# Altium PCB PCB1.PcbDoc (part 1 of 2)
Units mil, origin at the board's own origin, x right, y up, seen from the top; angles counter-clockwise.
Board outline 3935 x 3935 mil, 2 copper layers (Top Layer, Bottom Layer); 151 components, 133 nets, 573 pads, 224 vias.
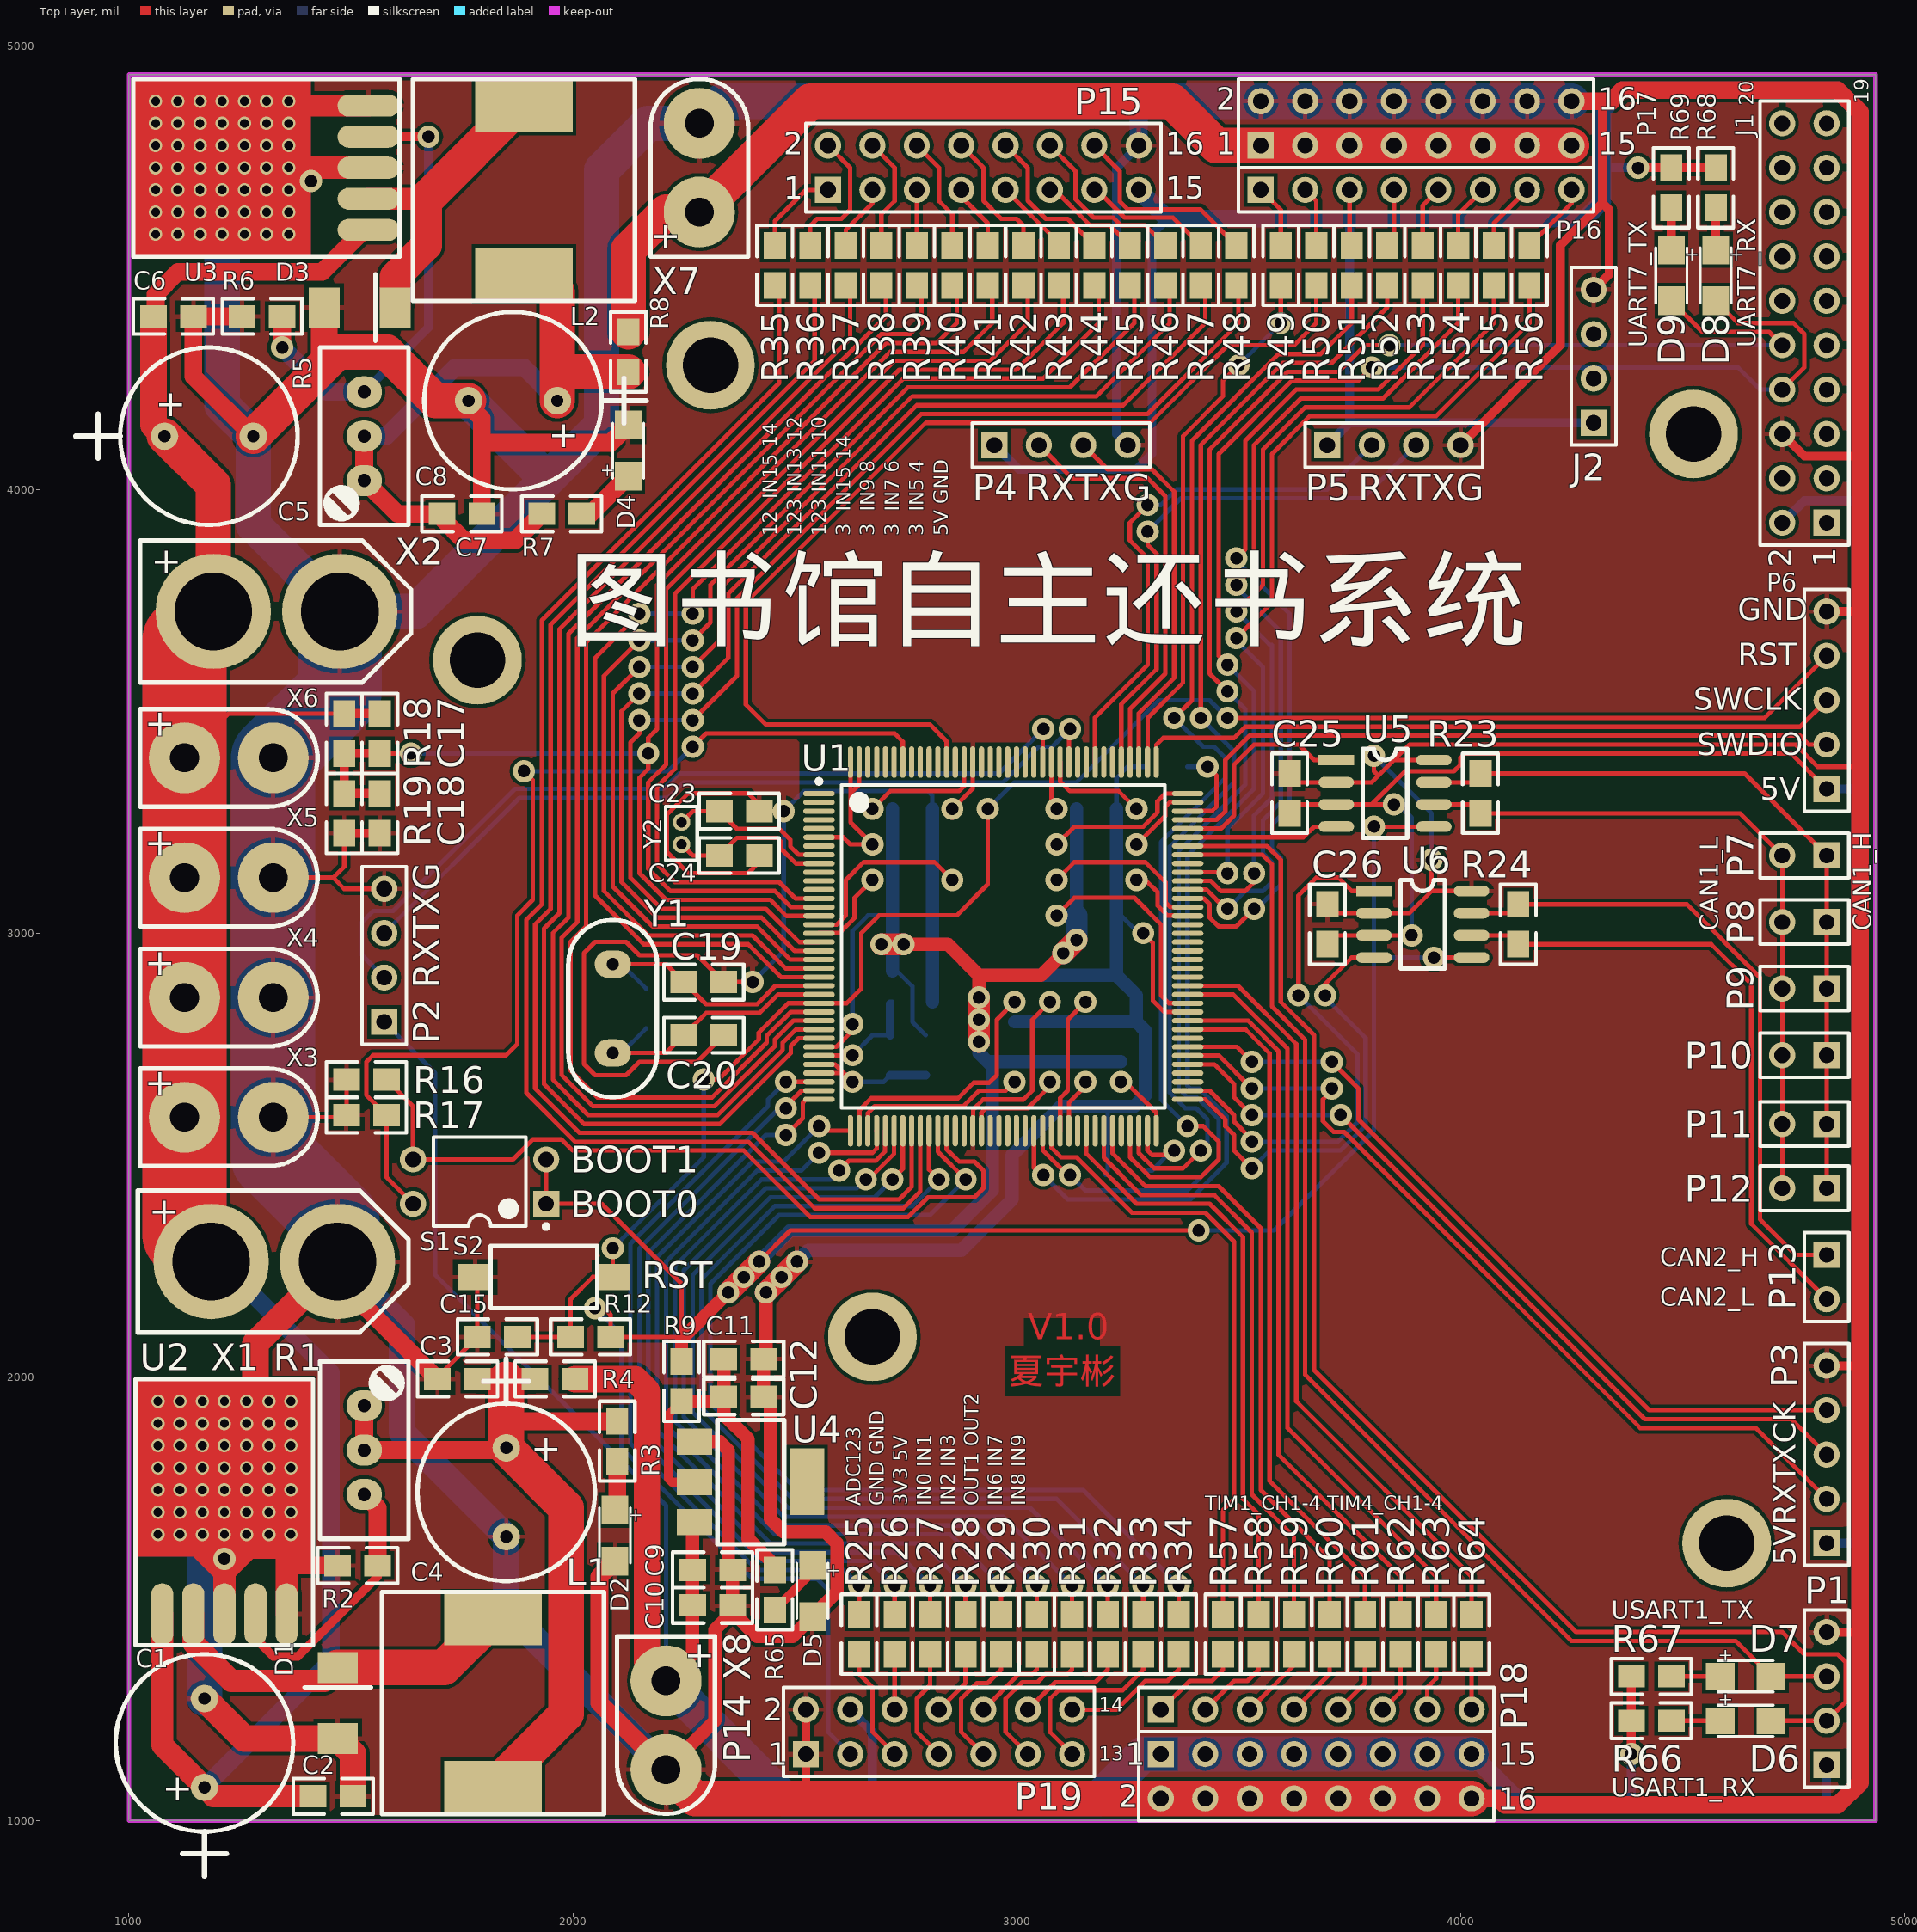
[diagram p0: Top Layer view]
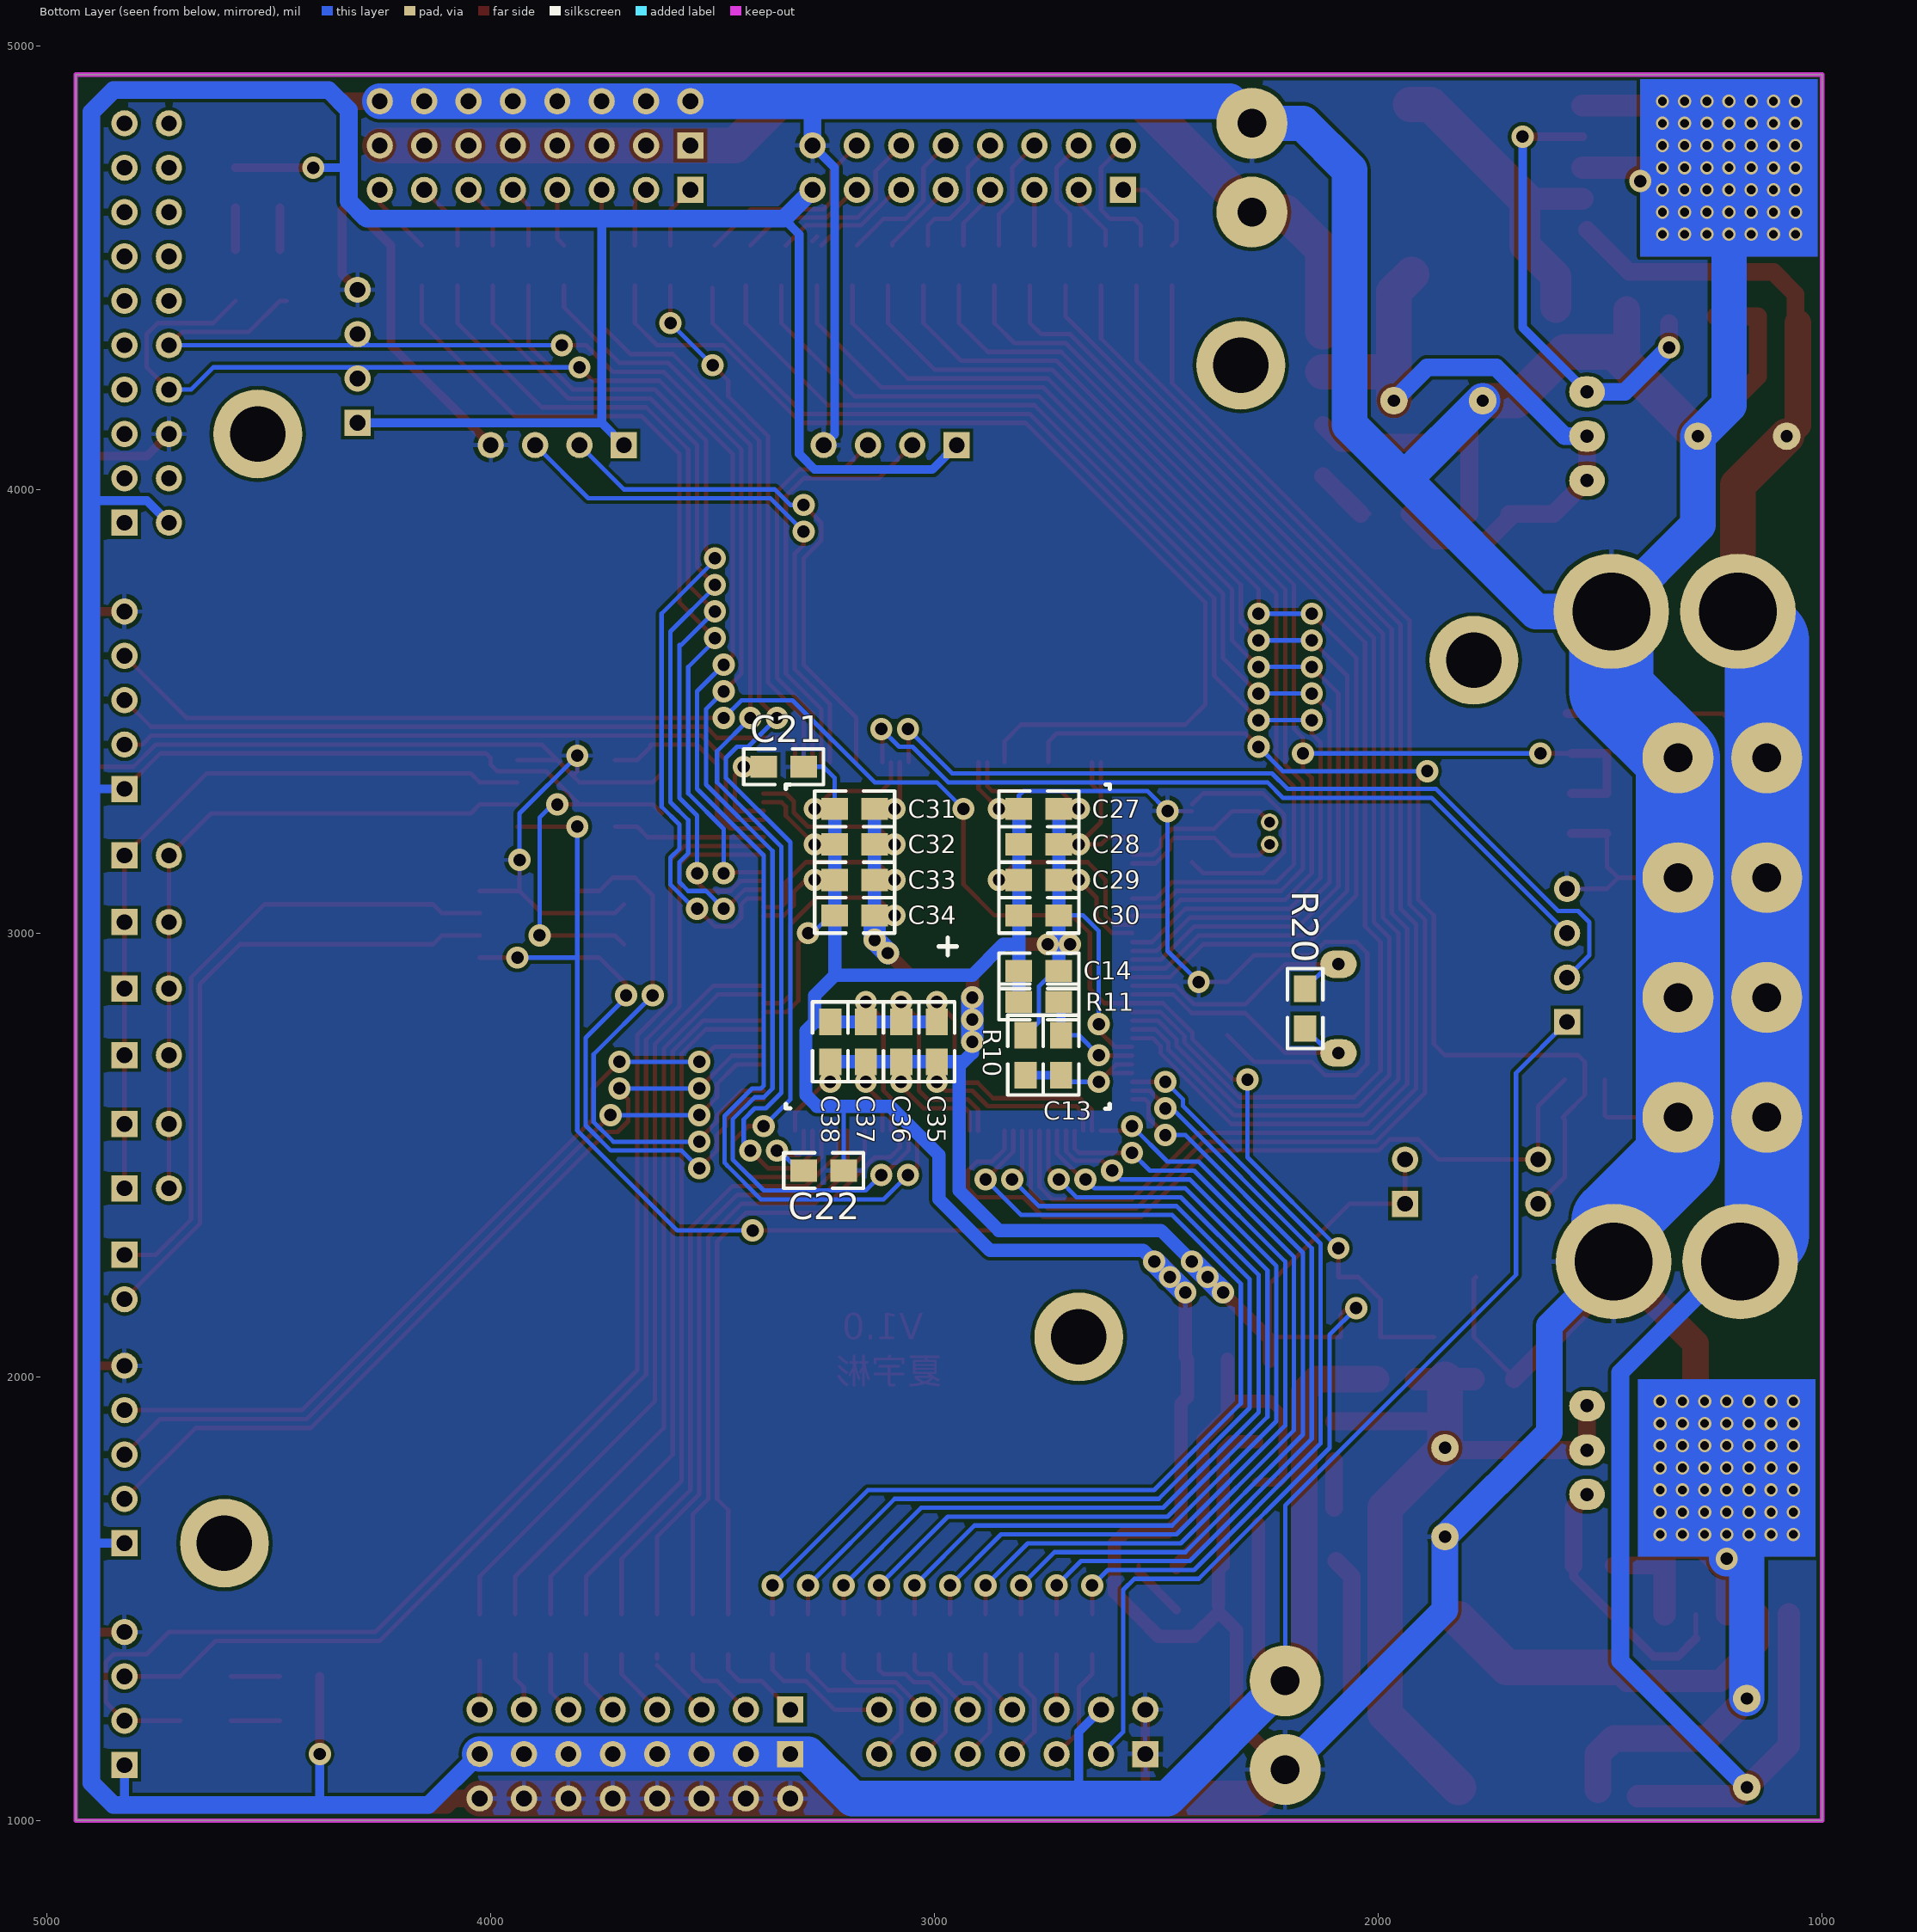
[diagram p1: Bottom Layer view, seen from below]

## Layer stack, top to bottom
Top Solder: solder mask 0.4, Solder Resist, Dk 3.5
Top Layer: signal copper 1.4
Dielectric 1: dielectric 12.6, FR-4, Dk 4.8
Bottom Layer: signal copper 1.4
Bottom Solder: solder mask 0.4, Solder Resist, Dk 3.5

## Board outline
1000,1000 4935,1000 4935,4935 1000,4935

## Design rules (kind name [scope] priority, off if disabled: settings)
Clearance [All] p1: gap=8
PolygonConnect [All] p1: connectstyle=Relief reliefconductorwidth=10 reliefentries=4 polygonreliefangle="90 Angle" airgapwidth=10
RoutingVias [All] p1: holewidth=28 width=50 viastyle="Through Hole" minholewidth=28 minwidth=50 maxholewidth=28 maxwidth=50
SolderMaskExpansion [All] p1: expansion=4
Width [All] p1: maxlimit=10 minlimit=10 preferedwidth=10
30 further rules are at their usual default settings.

## Components (designator, comment, footprint, x,y, rotation, side; value= is the part's Value field where it differs from the comment)
C1 "Cap Pol1" RB-.2/.4 1170,1075 r270 top
C2 "Cap" 0805 1505,1055 r180 top
C3 "Cap" 0805 1785,1995 r180 top
C4 "Cap Pol1" RB-.2/.4 1850,1840 r90 top
C5 "Cap Pol1" RB-.2/.4 1080,4120 r180 top
C6 "Cap" 0805 1145,4390 r180 top
C7 "Cap" 0805 1705,3945 r0 top
C8 "Cap Pol1" RB-.2/.4 1965,4200 r0 top
C9 "Cap Pol1" 0805 2270,1565 r0 top
C10 "Cap" 0805 2360,1485 r180 top
C11 "Cap Pol1" 0805 2340,2040 r0 top
C12 "Cap" 0805 2430,1955 r180 top
C13 "Cap" 0805 2715,2770 r270 bottom
C14 "Cap" 0805 2810,2915 r180 bottom
C15 "Cap" 0805 1875,2090 r180 top
C17 "Cap" 0805 1565,3405 r90 top
C18 "Cap" 0805 1565,3225 r90 top
C19 "Cap" 0805 2250,2890 r0 top
C20 "Cap" 0805 2250,2770 r0 top
C21 "Cap" 0805 3295,3375 r0 bottom
C22 "Cap" 0805 3205,2465 r0 bottom
C23 "12pF" 0805 2420,3275 r180 top
C24 "12pF" 0805 2420,3175 r180 top
C25 "Cap" 0805 3615,3270 r90 top
C26 "Cap" 0805 3700,2975 r90 top
C27 "Cap" 0805 2810,3280 r180 bottom
C28 "Cap" 0805 2810,3200 r180 bottom
C29 "Cap" 0805 2810,3120 r180 bottom
C30 "Cap" 0805 2810,3040 r180 bottom
C31 "Cap" 0805 3225,3280 r180 bottom
C32 "Cap" 0805 3225,3200 r180 bottom
C33 "Cap" 0805 3225,3120 r180 bottom
C34 "Cap" 0805 3225,3040 r180 bottom
C35 "Cap" 0805 2995,2800 r270 bottom
C36 "Cap" 0805 3075,2800 r270 bottom
C37 "Cap" 0805 3155,2800 r270 bottom
C38 "Cap" 0805 3235,2800 r270 bottom
D1 "SS54" DO-214AA 1515,1150 r90 top
D2 "LED_RED" 1206_LED 2060,1705 r270 top
D3 "SS54" DO-214AA 1405,4365 r0 top
D4 "LED_RED" 1206_LED 2160,4025 r90 top
D5 "LED_RED" 1206_LED 2505,1580 r270 top
D6 "LED_RED" 1206_LED 4580,1190 r0 top
D7 "LED_RED" 1206_LED 4580,1290 r0 top
D8 "LED_RED" 1206_LED 4540,4545 r270 top
D9 "LED_RED" 1206_LED 4440,4545 r270 top
J1 "Header 10X2H" HDR2X10 4825,3925 r90 top
J2 "USART3" HDR1X4 4300,4150 r90 top
L1 "Inductor" 12*12*7贴片电感 1570,1015 r0 top
L2 "Inductor" 12*12*7贴片电感 1640,4425 r0 top
P1 "USART1" HDR1X4 4825,1125 r90 top
P2 "USART2" HDR1X4 1575,2800 r90 top
P3 "Header 5" HDR1X5 4825,1625 r90 top
P4 "USART3" HDR1X4 2950,4100 r0 top
P5 "USART3" HDR1X4 3700,4100 r0 top
P6 "Header 5" HDR1X5 4825,3325 r90 top
P7 "CAN1" HDR1X2 4825,3175 r180 top
P8 "CAN1" HDR1X2 4825,3025 r180 top
P9 "CAN1" HDR1X2 4825,2875 r180 top
P10 "CAN1" HDR1X2 4825,2725 r180 top
P11 "CAN1" HDR1X2 4825,2570 r180 top
P12 "CAN1" HDR1X2 4825,2425 r180 top
P13 "CAN2" HDR1X2 4825,2275 r270 top
P14 "Header 7X2" HDR2X7 2525,1150 r0 top
P15 "Header 8X2" HDR2X8#1 2575,4675 r0 top
P16 "Header 8" HDR1X8 3550,4675 r0 top
P17 "Header 8X2" HDR2X8#1 3550,4775 r0 top
P18 "Header 8" HDR1X8 3325,1250 r0 top
P19 "Header 8X2" HDR2X8#2 3325,1150 r0 top
R1 "Res Tap" 3296 1530,1835 r90 top
R2 "Res2" 0805 1470,1575 r0 top
R3 "Res2" 0805 2100,1900 r270 top
R4 "Res2" 0805 1915,1995 r0 top
R5 "Res Tap" 3296 1530,4120 r270 top
R6 "Res2" 0805 1255,4390 r0 top
R7 "Res2" 0805 1930,3945 r0 top
R8 "Res2" 0805 2125,4265 r90 top
R9 "Res2" 0805 2245,1945 r90 top
R10 "Res2" 0805 2795,2680 r90 bottom
R11 "Res2" 0805 2720,2845 r0 bottom
R12 "Res2" 0805 1995,2090 r0 top
R16 "Res2" 0805 1490,2670 r0 top
R17 "Res2" 0805 1490,2590 r0 top
R18 "9K" 0805 1485,3405 r90 top
R19 "1K" 0805 1485,3225 r90 top
R20 "Res2" 0805 2165,2785 r90 bottom
R23 "Res2" 0805 4045,3270 r90 top
R24 "120R" 0805 4130,2975 r90 top
R25 "100R" 0805 2645,1465 r270 top
R26 "100R" 0805 2725,1375 r90 top
R27 "100R" 0805 2805,1465 r270 top
R28 "100R" 0805 2885,1375 r90 top
R29 "100R" 0805 2965,1465 r270 top
R30 "100R" 0805 3045,1375 r90 top
R31 "100R" 0805 3125,1465 r270 top
R32 "100R" 0805 3205,1375 r90 top
R33 "100R" 0805 3285,1465 r270 top
R34 "100R" 0805 3365,1375 r90 top
R35 "100R" 0805 2455,4460 r90 top
R36 "100R" 0805 2535,4550 r270 top
R37 "100R" 0805 2615,4460 r90 top
R38 "100R" 0805 2695,4550 r270 top
R39 "100R" 0805 2775,4460 r90 top
R40 "100R" 0805 2855,4550 r270 top
R41 "100R" 0805 2935,4460 r90 top
R42 "100R" 0805 3015,4550 r270 top
R43 "100R" 0805 3095,4460 r90 top
R44 "100R" 0805 3175,4550 r270 top
R45 "100R" 0805 3255,4460 r90 top
R46 "100R" 0805 3335,4550 r270 top
R47 "100R" 0805 3415,4460 r90 top
R48 "100R" 0805 3495,4550 r270 top
R49 "100R" 0805 3595,4460 r90 top
R50 "100R" 0805 3675,4460 r90 top
R51 "100R" 0805 3755,4460 r90 top
R52 "100R" 0805 3835,4460 r90 top
R53 "100R" 0805 3915,4460 r90 top
R54 "100R" 0805 3995,4460 r90 top
R55 "100R" 0805 4075,4460 r90 top
R56 "100R" 0805 4155,4460 r90 top
R57 "100R" 0805 3465,1465 r270 top
R58 "100R" 0805 3545,1465 r270 top
R59 "100R" 0805 3625,1465 r270 top
R60 "100R" 0805 3705,1465 r270 top
R61 "100R" 0805 3785,1465 r270 top
R62 "100R" 0805 3865,1465 r270 top
R63 "100R" 0805 3945,1465 r270 top
R64 "100R" 0805 4025,1465 r270 top
R65 "Res2" 0805 2455,1475 r90 top
R66 "Res2" 0805 4475,1225 r180 top
R67 "Res2" 0805 4475,1325 r180 top
R68 "Res2" 0805 4575,4635 r90 top
R69 "Res2" 0805 4475,4635 r90 top
S1 "SW DIP-2" DIP-4 1790,2440 r180 top
S2 "SW-PB" "3*6 开关" 1815,2155 r0 top
U1 "STM32F429ZGT6" STM-LQFP144_N 2970,2970 r0 top locked
U2 "LM2596S-ADJ" TO-263 1015,1395 r0 top
U3 "LM2596S-ADJ" TO-263 1610,4525 r90 top
U4 "AMS1117-3.3V" SOT223 2274,1853.55 r270 top
U5 "MCP2562-E/MF" SO-8 3720,3390 r0 top
U6 "MCP2562-E/MF" SO-8 3805,3095 r0 top
X1 "XT60" XT60PB 1020,2100 r0 top
X2 "XT60" XT60PB 1025,3565 r0 top
X3 "XT30" XT30UPB 1025,2475 r0 top
X4 "XT30" XT30UPB 1025,2745 r0 top
X5 "XT30" XT30UPB 1025,3015 r0 top
X6 "XT30" XT30UPB 1025,3285 r0 top
X7 "XT30" XT30UPB 2395,4525 r90 top
X8 "XT30" XT30UPB 2100,1415 r270 top
Y1 "8MHz" XTAL 2090,2830 r270 top
Y2 "32.768k" MHDR1X2 2245,3200 r90 top

## Footprints (in the part's own frame and the unit in brackets; to place one, negate y for a bottom-side part, rotate by r counter-clockwise, add the part's x,y. Pads: shape width x height; smd on the part's side, far side on the other; paste and mask are expansions set on the pad)
"3*6 开关" [mil]
  rect 80x60 smd: 1(-35,70) 2(275,70)
  silkscreen extent 0,0 240,140
12*12*7贴片电感 [mil]
  rect 220x120 smd: 1(250,440) 2(250,60)
  silkscreen extent 0,0 500,500
0805 [mil]
  rect 60x50 smd: 1(0,0) 2(90,0)
  silkscreen extent -45,-40 135,40
1206_LED [mil]
  rect 65x60 smd: 1(5,35) 2(120,35)
  silkscreen extent 0,0 125,70
3296 [mil]
  oval 70x80 hole 30: 1(-100,0) 2(0,0) 3(100,0)
  silkscreen extent -200,-100 200,100
DIP-4 [mm] "DIP; 4 Leads; Row Spacing 7.62 mm; Pitch 2.54 mm"
  rect 1.5x1.5 hole 0.9: 1(-3.81,1.27)
  round 1.5 hole 0.9: 2(-3.81,-1.27) 3(3.81,-1.27) 4(3.81,1.27)
  silkscreen extent -3.94,-2.55 2.65,2.69, body extent -3.15,-2.5 3.15,2.5, height 5.6
DO-214AA [mil]
  rect 70x90 smd: 1(35,45) 2(195,45)
  silkscreen extent 150,-30 150,120
HDR1X2 [mm] "Connector; Header; 2 Position"
  rect 1.5x1.5 hole 0.9: 1(0,0)
  round 1.5 hole 0.9: 2(2.54,0)
  silkscreen extent -1.27,-1.27 3.81,1.27
HDR1X4 [mm] "Connector; Header; 4 Position"
  rect 1.5x1.5 hole 0.9: 1(0,0)
  round 1.5 hole 0.9: 2(2.54,0) 3(5.08,0) 4(7.62,0)
  silkscreen extent -1.27,-1.27 8.89,1.27
HDR1X5 [mm] "Connector; Header; 5 Position"
  rect 1.5x1.5 hole 0.9: 1(0,0)
  round 1.5 hole 0.9: 2(2.54,0) 3(5.08,0) 4(7.62,0) 5(10.16,0)
  silkscreen extent -1.27,-1.27 11.43,1.27
HDR1X8 [mm] "Connector; Header; 8 Position"
  rect 1.5x1.5 hole 0.9: 1(0,0)
  round 1.5 hole 0.9: 2(2.54,0) 3(5.08,0) 4(7.62,0) 5(10.16,0) 6(12.7,0) 7(15.24,0) 8(17.78,0)
  silkscreen extent -1.27,-1.27 19.05,1.27
HDR2X7 [mm] "Connector; Header; 7x2 Position"
  rect 1.5x1.5 hole 0.9: 1(0,0)
  round 1.5 hole 0.9: 2(0,2.54) 3(2.54,0) 4(2.54,2.54) 5(5.08,0) 6(5.08,2.54) 7(7.62,0) 8(7.62,2.54) 9(10.16,0) 10(10.16,2.54) 11(12.7,0) 12(12.7,2.54) 13(15.24,0) 14(15.24,2.54)
  silkscreen extent -1.27,-1.27 16.51,3.81
HDR2X8#1 [mm] "Connector; Header; 8x2 Position"
  rect 1.5x1.5 hole 0.9: 1(0,0)
  round 1.5 hole 0.9: 2(0,2.54) 3(2.54,0) 4(2.54,2.54) 5(5.08,0) 6(5.08,2.54) 7(7.62,0) 8(7.62,2.54) 9(10.16,0) 10(10.16,2.54) 11(12.7,0) 12(12.7,2.54) 13(15.24,0) 14(15.24,2.54) 15(17.78,0) 16(17.78,2.54)
  silkscreen extent -1.27,-1.27 19.05,3.81
HDR2X8#2 [mm] "Connector; Header; 8x2 Position"
  rect 1.5x1.5 hole 0.9: 1(0,0)
  round 1.5 hole 0.9: 2(0,-2.54) 3(2.54,0) 4(2.54,-2.54) 5(5.08,0) 6(5.08,-2.54) 7(7.62,0) 8(7.62,-2.54) 9(10.16,0) 10(10.16,-2.54) 11(12.7,0) 12(12.7,-2.54) 13(15.24,0) 14(15.24,-2.54) 15(17.78,0) 16(17.78,-2.54)
  silkscreen extent -1.27,-3.81 19.05,1.27
HDR2X10 [mm] "Connector; Header; 10x2 Position"
  rect 1.5x1.5 hole 0.9: 1(0,0)
  round 1.5 hole 0.9: 2(0,2.54) 3(2.54,0) 4(2.54,2.54) 5(5.08,0) 6(5.08,2.54) 7(7.62,0) 8(7.62,2.54) 9(10.16,0) 10(10.16,2.54) 11(12.7,0) 12(12.7,2.54) 13(15.24,0) 14(15.24,2.54) 15(17.78,0) 16(17.78,2.54) 17(20.32,0) 18(20.32,2.54) 19(22.86,0) 20(22.86,2.54)
  silkscreen extent -1.27,-1.27 24.13,3.81
MHDR1X2 [mm] "Connector; Header; 2 Position"
  round 1 hole 0.6: 1(0,0) 2(1.27,0)
  silkscreen extent -0.9,-0.9 2.17,0.9
RB-.2/.4 [mil]
  round 62 hole 28: 1(0,0) 2(-200,0)
  silkscreen extent -300,-200 200,200
SO-8 [mil]
  rect 80x24 smd: 1(0,0)
  oval 80x24 smd: 2(0,-50) 3(0,-100) 4(0,-150) 5(220,-150) 6(220,-100) 7(220,-50) 8(220,0)
  silkscreen extent 60,-175 160,25
SOT223 [mil]
  rect 59x79 smd: 1(0,0) 2(90.55,0) 3(181.1,0)
  rect 150x79 smd: 4(89.88,253.54)
  silkscreen extent -49,52 231,202
STM-LQFP144_N [mm] "Thin QFP, 144-Leads, Body 20x20mm, Pitch 0.5mm, IPC Medium Density"
  oval 1.8x0.3 smd: 1(-10.55,8.75) 2(-10.55,8.25) 3(-10.55,7.75) 4(-10.55,7.25) 5(-10.55,6.75) 6(-10.55,6.25) 7(-10.55,5.75) 8(-10.55,5.25) 9(-10.55,4.75) 10(-10.55,4.25) 11(-10.55,3.75) 12(-10.55,3.25) 13(-10.55,2.75) 14(-10.55,2.25) 15(-10.55,1.75) 16(-10.55,1.25) 17(-10.55,0.75) 18(-10.55,0.25) 19(-10.55,-0.25) 20(-10.55,-0.75) 21(-10.55,-1.25) 22(-10.55,-1.75) 23(-10.55,-2.25) 24(-10.55,-2.75) 25(-10.55,-3.25) 26(-10.55,-3.75) 27(-10.55,-4.25) 28(-10.55,-4.75) 29(-10.55,-5.25) 30(-10.55,-5.75) 31(-10.55,-6.25) 32(-10.55,-6.75) 33(-10.55,-7.25) 34(-10.55,-7.75) 35(-10.55,-8.25) 36(-10.55,-8.75) 73(10.55,-8.75) 74(10.55,-8.25) 75(10.55,-7.75) 76(10.55,-7.25) 77(10.55,-6.75) 78(10.55,-6.25) 79(10.55,-5.75) 80(10.55,-5.25) 81(10.55,-4.75) 82(10.55,-4.25) 83(10.55,-3.75) 84(10.55,-3.25) 85(10.55,-2.75) 86(10.55,-2.25) 87(10.55,-1.75) 88(10.55,-1.25) 89(10.55,-0.75) 90(10.55,-0.25) 91(10.55,0.25) 92(10.55,0.75) 93(10.55,1.25) 94(10.55,1.75) 95(10.55,2.25) 96(10.55,2.75) 97(10.55,3.25) 98(10.55,3.75) 99(10.55,4.25) 100(10.55,4.75) 101(10.55,5.25) 102(10.55,5.75) 103(10.55,6.25) 104(10.55,6.75) 105(10.55,7.25) 106(10.55,7.75) 107(10.55,8.25) 108(10.55,8.75)
  oval 0.3x1.8 smd: 37(-8.75,-10.55) 38(-8.25,-10.55) 39(-7.75,-10.55) 40(-7.25,-10.55) 41(-6.75,-10.55) 42(-6.25,-10.55) 43(-5.75,-10.55) 44(-5.25,-10.55) 45(-4.75,-10.55) 46(-4.25,-10.55) 47(-3.75,-10.55) 48(-3.25,-10.55) 49(-2.75,-10.55) 50(-2.25,-10.55) 51(-1.75,-10.55) 52(-1.25,-10.55) 53(-0.75,-10.55) 54(-0.25,-10.55) 55(0.25,-10.55) 56(0.75,-10.55) 57(1.25,-10.55) 58(1.75,-10.55) 59(2.25,-10.55) 60(2.75,-10.55) 61(3.25,-10.55) 62(3.75,-10.55) 63(4.25,-10.55) 64(4.75,-10.55) 65(5.25,-10.55) 66(5.75,-10.55) 67(6.25,-10.55) 68(6.75,-10.55) 69(7.25,-10.55) 70(7.75,-10.55) 71(8.25,-10.55) 72(8.75,-10.55) 109(8.75,10.55) 110(8.25,10.55) 111(7.75,10.55) 112(7.25,10.55) 113(6.75,10.55) 114(6.25,10.55) 115(5.75,10.55) 116(5.25,10.55) 117(4.75,10.55) 118(4.25,10.55) 119(3.75,10.55) 120(3.25,10.55) 121(2.75,10.55) 122(2.25,10.55) 123(1.75,10.55) 124(1.25,10.55) 125(0.75,10.55) 126(0.25,10.55) 127(-0.25,10.55) 128(-0.75,10.55) 129(-1.25,10.55) 130(-1.75,10.55) 131(-2.25,10.55) 132(-2.75,10.55) 133(-3.25,10.55) 134(-3.75,10.55) 135(-4.25,10.55) 136(-4.75,10.55) 137(-5.25,10.55) 138(-5.75,10.55) 139(-6.25,10.55) 140(-6.75,10.55) 141(-7.25,10.55) 142(-7.75,10.55) 143(-8.25,10.55) 144(-8.75,10.55)
  silkscreen extent -10.67,-9.25 9.25,9.57, body extent -10,-10 10,10, height 1.6
TO-263 [mil]
  oval 50x140 smd: 1(60,70) 2(130,70) 3(200,70) 4(270,70) 5(340,70)
  Top Layer region: 0,200 400,200 400,600 0,600
  Bottom Layer region: 0,200 400,200 400,600 0,600
  silkscreen extent 0,0 400,600
XT30UPB [mil]
  round 160 hole 65: 1(100,110) 2(300,110)
  silkscreen extent 0,0 400,220
XT60PB [mil]
  round 260 hole 175: 1(165,160) 2(450,160)
  silkscreen extent 0,0 610,320
XTAL [mil]
  oval 62x82 hole 28: 1(-100,0) 2(100,0)
  silkscreen extent -200,-100 200,100

## Part data
C1 C4 C5 C8 C9 C11: "Polarized Capacitor (Radial)"
C2 C3 C6 C7 C10 C12 C13 C14 C15 C17 C18 C19 C20 C21 C22 C25 C26 C27 C28 C29 C30 C31 C32 C33 C34 C35 C36 C37 C38: "Capacitor"
C23 C24: library part CAP, "Capcitor"
D1 D3: library part "Diode 11DQ03", "Schottky Rectifier"
D2 D4 D5 D6 D7 D8 D9: library part LED3, "Typical BLUE SiC LED"
J1: "Header, 10-Pin, Dual row, Right Angle"
J2 P1 P2 P4 P5: library part "Header 4", "Header, 4-Pin"
P3 P6: "Header, 5-Pin"
P7 P8 P9 P10 P11 P12 P13 X1 X2 X3 X4 X5 X6 X7 X8: library part "Header 2", "Header, 2-Pin"
P14: "Header, 7-Pin, Dual row"
P15 P17 P19: "Header, 8-Pin, Dual row"
P16 P18: "Header, 8-Pin"
R1 R5: "Tapped Resistor"
R2 R3 R4 R6 R7 R8 R9 R10 R11 R12 R16 R17 R20 R23 R65 R66 R67 R68 R69: "Resistor"
R18 R19 R24 R25 R26 R27 R28 R29 R30 R31 R32 R33 R34 R35 R36 R37 R38 R39 R40 R41 R42 R43 R44 R45 R46 R47 R48 R49 R50 R51 R52 R53 R54 R55 R56 R57 R58 R59 R60 R61 R62 R63 R64: library part Res2, "Resistor"
S1: "DIP Switch, 2 Position, SPST"
S2: "Switch"
U1: "ARM Cortex-M4 32-bit MCU+FPU, 225 DMIPS, 1024 kB Flash, 256 kB Internal RAM, 114 I/Os, 144-pin LQFP, -40 to 85 degC, Tray"
U2 U3: library part LM2576S-5.0, "CI-LM2576S-5.0"
U4: library part 11
Y1: library part XTAL, "Crystal Oscillator"
Y2: library part CRYSTAL, "Crystal 8MHz PLUG"

## Free pads (board coordinates)
  round 200 hole 125: 0(1785,3615) 0(2310,4280) 0(2675,2090) 0(4525,4125) 0(4600,1625)

## Via types
v1: diameter 50, hole 28, Top Layer to Bottom Layer, tented both sides, 126 vias
v2: diameter 30, hole 20, Top Layer to Bottom Layer, tented both sides, 98 vias

## Nets (pads, with @x,y where several pads share a name; then routed paths per layer and width w, separated by ;. In a path a pad name is that pad's centre, name@x,y a point inside that pad or via, vN(x,y) a via of type N, cw(c..) or ccw(c..) an arc to the next point about the centre after c; other vN are vias at no path point)
ADC3_IN4: R48.2 U1.18 | length 2751.3
  Top Layer w10: v1(2150,3480) 2150,3450 2130,3430 2130,3125 2200,3055 2435,3055 2510.16,2979.84 U1.18@2554.65,2979.84 ; v1(2270,3480) 2370,3580 2370,3755 2785,4170 3295,4170 3500,4375 R48.2@3500,4455
  Bottom Layer w10: v1(2150,3480) v1(2270,3480)
ADC3_IN5: R47.1 U1.19 | length 2741.2
  Top Layer w10: v1(2150,3540) 2110,3500 2110,3115 2190,3035 2425,3035 2499.84,2960.16 U1.19@2554.65,2960.16 ; v1(2270,3540) 2350,3620 2350,3765 2775,4190 3240,4190 3425,4375 R47.1@3425,4460
  Bottom Layer w10: v1(2150,3540) v1(2270,3540)
ADC3_IN6: R46.2 U1.20 | length 2721
  Top Layer w10: v1(2150,3600) 2090,3540 2090,3105 2180,3015 2415,3015 2489.53,2940.47 U1.20@2554.65,2940.47 ; v1(2270,3600) 2330,3660 2330,3775 2765,4210 3180,4210 3345,4375 R46.2@3345,4460
  Bottom Layer w10: v1(2150,3600) v1(2270,3600)
ADC3_IN7: R45.1 U1.21 | length 2700.9
  Top Layer w10: v1(2150,3660) 2070,3580 2070,3095 2170,2995 2405,2995 2479.21,2920.79 U1.21@2554.65,2920.79 ; v1(2270,3660) 2310,3700 2310,3785 2755,4230 3120,4230 3265,4375 R45.1@3265,4460
  Bottom Layer w10: v1(2150,3660) v1(2270,3660)
ADC3_IN8: R44.2 U1.22 | length 2680.8
  Top Layer w10: v1(2150,3720) 2050,3620 2050,3085 2160,2975 2395,2975 2468.9,2901.1 U1.22@2554.65,2901.1 ; v1(2270,3720) 2270,3775 2745,4250 3060,4250 3185,4375 R44.2@3185,4460
  Bottom Layer w10: v1(2150,3720) v1(2270,3720)
ADC3_IN9: R43.1 U1.13 | length 2235.7
  Top Layer w10: U1.13@2554.65,3078.27 2501.73,3078.27 2465,3115 2230,3115 2190,3155 2190,3330 2230,3370 2230,3765 2735,4270 3000,4270 3105,4375 R43.1@3105,4460
ADC3_IN14: R42.2 U1.14 | length 2215.5
  Top Layer w10: U1.14@2554.65,3058.58 2491.42,3058.58 2455,3095 2220,3095 2170,3145 2170,3340 2210,3380 2210,3775 2725,4290 2940,4290 3025,4375 R42.2@3025,4460
ADC3_IN15: C17.1 C18.2 R18.1 R19.2 R41.1 U1.15 | length 3050.4
  Top Layer w10: C17.1@1565,3405 v1(1635,3405) ; U1.15@2554.65,3038.9 2481.1,3038.9 2445,3075 2210,3075 2150,3135 2150,3350 2170,3370 v1(2170,3405) 2170,3440 2190,3460 2190,3785 2715,4310 2880,4310 2945,4375 R41.1@2945,4460
  Top Layer w20: C18.2@1565,3315 R19.2@1485,3315 R18.1@1485,3405 C17.1@1565,3405
  Bottom Layer w10: v1(1635,3405) v1(2170,3405)
ADC12_IN6: R31.1 U1.42 | length 2061.9
  Top Layer w10: v1(2660,2445) 2665.91,2445 2723.94,2503.03 U1.42@2723.94,2554.65 ; R31.1@3125,1465 v1(3125,1530)
  Bottom Layer w10: v1(2660,2445) 2640,2425 2435,2425 2250,2240 2250,1910 2475,1685 2970,1685 v1(3125,1530)
ADC12_IN7: R32.2 U1.43 | length 2130
  Top Layer w10: v1(2720,2445) 2743.62,2468.62 U1.43@2743.62,2554.65 ; R32.2@3205,1465 v1(3205,1530)
  Bottom Layer w10: v1(2720,2445) 2680,2405 2445,2405 2270,2230 2270,1920 2485,1705 3030,1705 v1(3205,1530)
ADC12_IN8: R33.1 U1.46 | length 2262.8
  Top Layer w10: U1.46@2802.68,2554.65 2802.68,2467.32 v1(2825,2445) ; R33.1@3285,1465 v1(3285,1530)
  Bottom Layer w10: v1(2825,2445) 2765,2385 2455,2385 2290,2220 2290,1930 2495,1725 3090,1725 v1(3285,1530)
ADC12_IN9: R34.2 U1.47 | length 2367.8
  Top Layer w10: U1.47@2822.36,2554.65 2822.36,2507.64 v1(2885,2445) ; R34.2@3365,1465 v1(3365,1530)
  Bottom Layer w10: v1(2885,2445) 2805,2365 2465,2365 2310,2210 2310,1940 2505,1745 3150,1745 v1(3365,1530)
ADC12_IN14: R36.2 U1.44 | length 3160.9
  Top Layer w10: R36.2@2545,4460 2545,4290 1950,3695 1950,3055 1915,3020 1915,2650 2015,2550 2405,2550 2555,2400 2735,2400 2763.31,2428.31 U1.44@2763.31,2554.65
ADC12_IN15: R35.1 U1.45 | length 3204.2
  Top Layer w10: R35.1@2465,4460 2465,4240 1930,3705 1930,3065 1895,3030 1895,2640 2005,2530 2395,2530 2545,2380 2745,2380 2782.99,2417.99 U1.45@2782.99,2554.65
ADC123_IN0: R25.1 U1.34 | length 1767.1
  Top Layer w10: v1(2480,2664.88) U1.34@2554.65,2664.88 ; R25.1@2645,1465 v1(2645,1530)
  Bottom Layer w10: v1(2480,2664.88) 2480,2645 2470,2655 2440,2625 2440,2610 2130,2300 2130,1850 2415,1565 2610,1565 v1(2645,1530)
ADC123_IN1: R26.2 U1.35 | length 1761.4
  Top Layer w10: v1(2480,2605) 2480,2610 2515.2,2645.2 U1.35@2554.65,2645.2 ; R26.2@2725,1465 v1(2725,1530)
  Bottom Layer w10: v1(2480,2605) 2465,2605 2150,2290 2150,1860 2425,1585 2670,1585 v1(2725,1530)
ADC123_IN2: R27.1 U1.36 | length 1799.1
  Top Layer w10: v1(2480,2545) 2518,2583 2518,2618 2525.51,2625.51 U1.36@2554.65,2625.51 ; R27.1@2805,1465 v1(2805,1530)
  Bottom Layer w10: v1(2480,2545) 2435,2545 2170,2280 2170,1870 2435,1605 2730,1605 v1(2805,1530)
ADC123_IN3: R28.2 U1.37 | length 1857
  Top Layer w10: v1(2555,2565) 2565.35,2554.65 U1.37@2625.51,2554.65 ; R28.2@2885,1465 v1(2885,1530)
  Bottom Layer w10: v1(2555,2565) 2475,2485 2405,2485 2190,2270 2190,1880 2445,1625 2790,1625 v1(2885,1530)
ADC123_IN10: R40.2 U1.26 | length 2870.7
  Top Layer w10: U1.26@2554.65,2822.36 2490.99,2822.36 2437,2768.37 2437,2753.37 2313.63,2630 2055,2630 1995,2690 1995,2980 2030,3015 2030,3655 2705,4330 2820,4330 2865,4375 R40.2@2865,4460
ADC123_IN11: R39.1 U1.27 | length 2850.8
  Top Layer w10: U1.27@2554.65,2802.68 2496.77,2802.68 2455,2760.91 2455,2745.91 2319.09,2610 2045,2610 1975,2680 1975,2990 2010,3025 2010,3665 2695,4350 2760,4350 2785,4375 R39.1@2785,4460
ADC123_IN12: R38.2 U1.28 | length 2823
  Top Layer w10: U1.28@2554.65,2782.99 2502.54,2782.99 2473,2753.46 2473,2737.08 2325.92,2590 2035,2590 1955,2670 1955,3000 1990,3035 1990,3675 2705,4390 R38.2@2705,4460
ADC123_IN13: R37.1 U1.29 | length 2832.4
  Top Layer w10: U1.29@2554.65,2763.31 2508.31,2763.31 2491,2746 2491,2729.62 2331.38,2570 2025,2570 1935,2660 1935,3010 1970,3045 1970,3685 2625,4340 R37.1@2625,4460
BOOT0: R17.2 S1.4 U1.138 | length 2302.5
  Top Layer w10: R17.2@1580,2590 1535,2635 1535,2710 1550,2725 1850,2725 1875,2750 1875,3040 1910,3075 1910,3345 v1(1890,3365) v1@1890,3360 ; R17.2@1585,2585 1580,2580 1580,2450 S1.4@1640,2390 ; v1(2270,3420) 2300,3450 2725,3450 2743.62,3431.38 U1.138@2743.62,3385.35
  Bottom Layer w10: v1(1890,3365) 2215,3365 v1(2270,3420)
BOOT1: R16.2 S1.3 U1.48 | length 1792.1
  Top Layer w10: R16.2@1580,2670 1640,2610 S1.3@1640,2490 1865,2490 1910,2535 1974.54,2535 1997.54,2512 1998,2512 2000,2510 2385,2510 2535,2360 2755,2360 2800,2405 2905,2405 2925,2425 2925,2465 2905,2485 2870.46,2485 2842.05,2513.41 U1.48@2842.05,2554.65
CAN1_H: P7.1 P8.1 P9.1 P10.1 P11.1 P12.1 R23.2 U5.7 | length 1719.9
  Top Layer w10: U5.7@3940,3340 4025,3340 R23.2@4045,3360 4640,3360 P7.1@4825,3175 P8.1@4825,3025 P9.1@4825,2875 P10.1@4825,2725 P11.1@4825,2570 P12.1@4825,2425
CAN1_L: P7.2 P8.2 P9.2 P10.2 P11.2 P12.2 R23.1 U5.6 | length 1582.6
  Top Layer w10: U5.6@3940,3290 4025,3290 R23.1@4045,3270 4630,3270 P7.2@4725,3175 P8.2@4725,3025 P9.2@4725,2875 P10.2@4725,2725 P11.2@4725,2570 P12.2@4725,2425
CAN1_RX: U1.103 U5.4 | length 344.6
  Top Layer w10: U1.103@3385.35,3216.06 3646.06,3216.06 3670,3240 U5.4@3720,3240
CAN1_TX: U1.104 U5.1 | length 492.8
  Top Layer w10: U1.104@3385.35,3235.75 3460.75,3235.75 3490,3265 3490,3380 3535,3425 3640,3425 ; 3640,3420 3670,3390 U5.1@3720,3390
CAN2_H: P13.1 R24.2 U6.7 | length 1454.8
  Top Layer w10: U6.7@4025,3045 4110,3045 R24.2@4130,3065 4510,3065 4675,2900 4675,2355 4755,2275 P13.1@4825,2275
CAN2_L: P13.2 R24.1 U6.6 | length 1456
  Top Layer w10: U6.6@4025,2995 4110,2995 R24.1@4130,2975 4565,2975 4655,2885 4655,2345 P13.2@4825,2175
CAN2_RX: U1.73 U6.4 | length 1025.2
  Top Layer w10: U1.73@3385.35,2625.51 3424.49,2625.51 3470,2580 3470,2565 3490,2545 3490,2510 v1(3530,2470) ; v1(3695,2860) 3695,2885 3755,2945 U6.4@3805,2945
  Bottom Layer w10: v1(3530,2470) 3570,2510 3729.2,2510 3786,2566.8 3786,2764 3695,2855 v1(3695,2860)
CAN2_TX: U1.74 U6.1 | length 1225.2
  Top Layer w10: U1.74@3385.35,2645.2 3434.8,2645.2 3490,2590 3490,2575 3530,2535 v1(3530,2530) ; v1(3635,2860) 3635,3085 3675,3125 3725,3125 3755,3095 U6.1@3805,3095
  Bottom Layer w10: v1(3530,2530) 3723.74,2530 3768,2574.26 3768,2727 v1(3635,2860)
DAC_OUT1: R29.1 U1.40 | length 1960.3
  Top Layer w10: v1(2555,2505) 2675,2505 2684.57,2514.57 U1.40@2684.57,2554.65 U1.40@2683.79,2553.87 ; R29.1@2965,1465 v1(2965,1530)
  Bottom Layer w10: v1(2555,2505) 2515,2465 2415,2465 2210,2260 2210,1890 2455,1645 2850,1645 v1(2965,1530)
DAC_OUT2: R30.2 U1.41 | length 2011
  Top Layer w10: v1(2600,2465) 2622,2487 2682.46,2487 2703.47,2508.02 2703.47,2554.65 U1.41@2704.25,2554.65 ; R30.2@3045,1465 v1(3045,1530)
  Bottom Layer w10: v1(2600,2465) 2580,2445 2425,2445 2230,2250 2230,1900 2465,1665 2910,1665 v1(3045,1530)
GND: C1.2 C2.1 C3.2 C4.2 C5.2 C6.1 C7.2 C8.2 C9.2 C10.1 C11.2 C12.1 C14.1 C15.2 C18.1 C19.2 C20.2 C21.1 C22.1 C23.1 C24.1 C25.2 C26.2 C27.1 C28.1 C29.1 C30.1 C31.1 C32.1 C33.1 C34.1 C35.1 C36.1 C37.1 C38.1 D1.1 D2.2 D3.1 D4.2 D5.2 J1.6 J2.4 P1.4 P2.4 P3.5 P4.4 P5.4 P6.5 P14.1 P14.2 P15.16 P17.2 P17.4 P17.6 P17.8 P17.10 P17.12 P17.14 P17.16 P19.2 P19.4 P19.6 P19.8 P19.10 P19.12 P19.14 P19.16 R2.1 R6.1 R11.2 R16.1 R17.1 R19.1 S2.1 U1.16 U1.38 U1.51 U1.61 U1.83 U1.94 U1.107 U1.120 U1.130 U2.3 U2.5 U3.3 U3.5 U4.1 U5.2 U5.8 U6.2 U6.8 X1.2 X2.2 X3.2 X4.2 X5.2 X6.2 X7.2 X8.2 | length 36614.2
  Top Layer w10: v1(1215,1590) v1@1215,1610 ; X3.2@1325,2585 1485,2585 R17.1@1490,2590 R16.1@1490,2670 ; X5.2@1325,3125 1460,3125 ; X1.2@1470,2220 X1.2@1470,2260 ; R19.1@1485,3225 1485,3150 1460,3125 ; P2.4@1575,3100 1485,3100 1460,3125 ; C3.2@1695,1995 1695,2000 C15.2@1785,2090 1785,2220 S2.1@1780,2225 ; C20.2@2340,2770 2280,2710 2150,2710 2120,2680 2050,2680 2025,2705 2025,2955 2050,2980 2120,2980 2150,2950 2280,2950 C19.2@2340,2890 v1(2405,2890) ; C24.1@2420,3160 2395,3135 2260,3135 2212.31,3182.69 2212.31,3267.31 2260,3315 2395,3315 C23.1@2420,3290 ; C23.1@2420,3275 v1(2475,3275) ; U1.16@2554.65,3019.21 2594.21,3019.21 2615,3040 2615,3120 2655,3160 2815,3160 v1(2855,3120) ; U1.38@2645.2,2554.65 2645.98,2554.65 2645.98,2601.43 2672.54,2628 2868,2628 2903,2663 2938,2663 2955,2680 2955,2805 v1(2995,2845) ; v1@2855,3260 2855,3279.54 2901.1,3325.65 U1.130@2901.1,3385.35 ; U1.51@2901.1,2554.65 2901.88,2555.43 2901.88,2602.34 2924.54,2625 3015,2625 3035,2645 3035,2805 v1(3075,2845) ; U1.61@3097.95,2554.65 3097.95,2627.95 3115,2645 3115,2805 v1(3155,2845) ; U1.120@3097.95,3385.35 3097.95,3342.05 3120,3320 3230,3320 v1(3270,3280) ; v1@3270.23,3199.77 3335,3264.54 3335,3285 3344.8,3294.8 U1.107@3385.35,3294.8 ; v1@3275,3120 3290,3120 3317.55,3092.45 3317.55,3062 3339.87,3039.68 3384.57,3039.68 U1.94@3385.35,3038.9 ; v1(3285,3000) 3307,2978 3307,2848 3332.64,2822.36 U1.83@3385.35,2822.36 ; C25.2@3615,3360 3635,3340 U5.2@3720,3340 3800,3340 3815,3355 ; C26.2@3700,3065 3720,3045 U6.2@3805,3045 3885,3045 3935,3095 ; v1(3805,3400) 3805,3365 3815,3355 ; v1@3815,3390 v1@3823.75,3390 ; v1(3935,3165) 3935,3095 ; U5.8@3940,3390 3850,3390 ; U6.8@4025,3095 3935,3095 ; 4900,3375 4805,3375 4755,3425 3885,3425 3850,3390 ; 3815,3355 3850,3390
  Top Layer w20: R19.1@1485,3225 C18.1@1565,3225 ; C10.1@2360,1470 C10.1@2360,1485 ; 2525,1050 P14.1@2525,1150 P14.2@2525,1250 ; P5.4@4000,4100 4225,4325 4225,4550 4320,4645 ; J2.4@4300,4450 4335,4485 4335,4630 4320,4645 ; 4320,4875 4320,4645 ; J1.6@4725,4125 4775,4075 4900,4075 ; P1.4@4825,1425 4900,1425 ; P3.5@4825,2025 4900,2025 ; P6.5@4825,3725 4900,3725
  Top Layer w30: X8.2@2210,1115 2320,1225 2320,1430 2360,1470 2415,1415 2495,1415 D5.2@2540,1460 2595,1515 2595,1625 2570,1650 2475,1650 2445,1680 2445,1940 C12.1@2430,1955 C11.2@2430,2040 2435,2045 v1(2435,2190) ; U4.1@2274,1853.55 2331.45,1853.55 2350,1835 2350,1575 C9.2@2360,1565 C10.1@2360,1485
  Top Layer w40: R6.1@1240,4390 C6.1@1145,4390 1145,4255 C5.2@1280,4120 ; 1355,1575 R2.1@1470,1575 ; 1390,4725 1390,4865 ; X1.2@1470,2220 C3.2@1695,1995 ; C8.2@1765,4200 1765,4190 1795,4160 1795,4105 ; C7.2@1795,3945 1795,4105 ; D2.2@2095,1585 2060,1550 2060,1265 X8.2@2210,1115 ; D4.2@2125,4145 2085,4105 1795,4105 ; P19.16@4025,1050 4085,1050 4100,1035 4850,1035 4900.53,1085.53 4900.53,1424.47 4900,1425 4900,2025 4900,3375 4900,3725 4900,4075 4900,4850 4850,4900 4365,4900 4340,4875 4320,4875 P17.16@4250,4875
  Top Layer w50: U2.3@1215,1465 1215,1560 1270,1615 1355,1615 1355,1575 U2.5@1355,1465 ; 1390,4725 U3.3@1540,4725 ; 1390,4865 U3.5@1540,4865 ; v1(2435,2190) v1(2470,2225) v1(2505,2260)
  Top Layer w60: C1.2@1170,1275 1260,1185 D1.1@1470,1185 1505,1150 C2.1@1505,1070 ; 1285,1680 1285,2075 X1.2@1470,2260 ; 1440,4280 D3.1@1440,4405
  Top Layer w80: C5.2@1280,4120 1440,4280 1470,4310 1580,4310 1690,4200 C8.2@1765,4200 ; X8.2@2210,1115 2275,1050 2525,1050 P19.2@3325,1050 P19.4@3425,1050 P19.6@3525,1050 P19.8@3625,1050 P19.10@3725,1050 P19.12@3825,1050 P19.14@3925,1050 P19.16@4025,1050
  Bottom Layer w10: 1210,4545 1260,4545 v1(1410,4695) ; 1940,4020 1940,4025 ; v1(2405,2890) 2475,2960 v1(2475,3275) 2520,3320 2800,3320 2810,3310 C27.1@2810,3280 ; C22.1@3200,2455 C22.1@3205,2455 ; C22.1@3205,2465 3205,2610 ; C34.1@3225,3040 3235,3040 3275,3000 v1(3285,3000) ; C31.1@3225,3280 3225,3350 3250,3375 C21.1@3295,3375 ; v1(3805,3400) 3935,3270 v1(3935,3165)
  Bottom Layer w20: P4.4@3250,4100 3225,4125 3225,4725 P15.16@3275,4775
  Bottom Layer w30: v1(2470,2225) 2470,2220 2475,2225 v1@2472.5,2227.5 ; v1(2505,2260) 2530,2285 2875,2285 2990,2400 2990,2500 3100,2610 3205,2610 3265,2610 3290,2635 3290,2780 3270,2800 ; R11.2@2810,2845 C14.1@2810,2915 2810,2975 ; C27.1@2810,3280 C28.1@2810,3200 C29.1@2810,3120 C30.1@2810,3040 2810,2975 ; C35.1@2995,2800 C36.1@3075,2800 C37.1@3155,2800 C38.1@3235,2800 3270,2800 ; C31.1@3225,3280 C32.1@3225,3200 C33.1@3225,3120 C34.1@3225,3040 3225,2905 ; 2810,2975 2845,2975 2915,2905 3225,2905 ; 3225,2905 3270,2860 3270,2800
  Bottom Layer w40: P15.16@3275,4775 3275,4835
  Bottom Layer w50: v1(2435,2190) v1(2470,2225) ; v1@2472.5,2227.5 v1(2505,2260)
  Bottom Layer w60: X1.2@1470,2260 1615,2115 1615,1875 C4.2@1850,1640 1850,1475 X8.2@2210,1115
  Bottom Layer w80: C1.2@1170,1275 1170,1590 v1(1215,1590) ; 1210,4545 1210,4190 C5.2@1280,4120 1280,3920 X2.2@1475,3725 1645,3725 1940,4020 2065,4145 2065,4720 2170,4825 X7.2@2285,4825 2335,4875 P17.2@3550,4875 P17.4@3650,4875 P17.6@3750,4875 P17.8@3850,4875 P17.10@3950,4875 P17.12@4050,4875 P17.14@4150,4875 P17.16@4250,4875 ; C8.2@1765,4200 1940,4025
  Bottom Layer w190: X1.2@1470,2260 1470,2350 1325,2495 X3.2@1325,2585 X4.2@1325,2855 X5.2@1325,3125 X6.2@1325,3395 1475,3545 X2.2@1475,3725
  other v1: 3270,3120 3270,3200 2855,3280
NetC3_1: C3.1 C4.1 L1.2 R1.2 R1.3 R3.1 R4.1 | length 1860.5
  Top Layer w10: C4.1@1845,1835 C4.1@1850,1840
  Top Layer w40: R1.3@1530,1935 R1.2@1530,1835 C4.1@1845,1835 ; 1850,1900 R3.1@2100,1900
  Top Layer w50: C3.1@1785,1995 1850,1995 R4.1@1915,1995
  Top Layer w80: L1.2@1820,1075 1985,1240 1985,1705 C4.1@1850,1840 1850,1900 1850,1995
  Bottom Layer w10: R1.2@1525,1830 R1.2@1530,1835 ; C4.1@1845,1835 C4.1@1850,1840